# Altium PCB vreg2.PcbDoc
Units mm, origin at the board's own origin, x right, y up, seen from the top; angles counter-clockwise.
Board outline 19.5 x 41.25 mm, 2 copper layers (Top Layer, Bottom Layer), stack 1.581 mm thick; 33 components, 14 nets, 114 pads, 32 vias.
Unrouted connection lines stored in the file: 27.
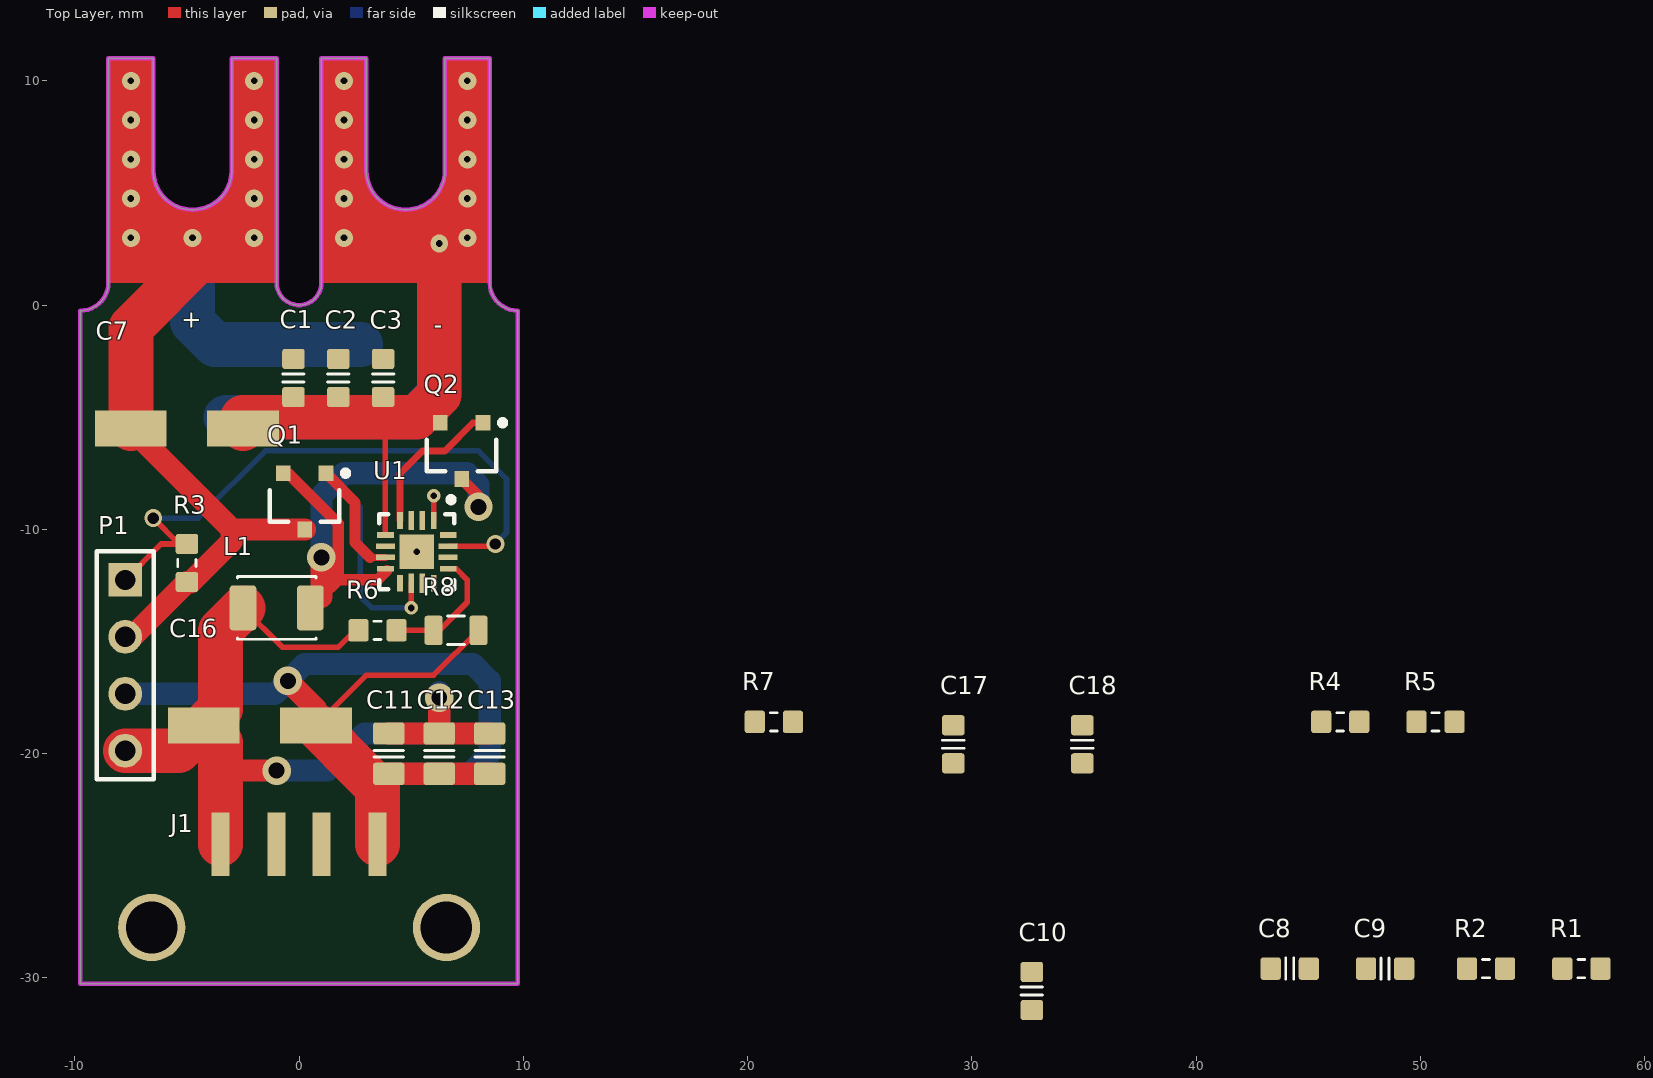
[diagram p0: Top Layer view]
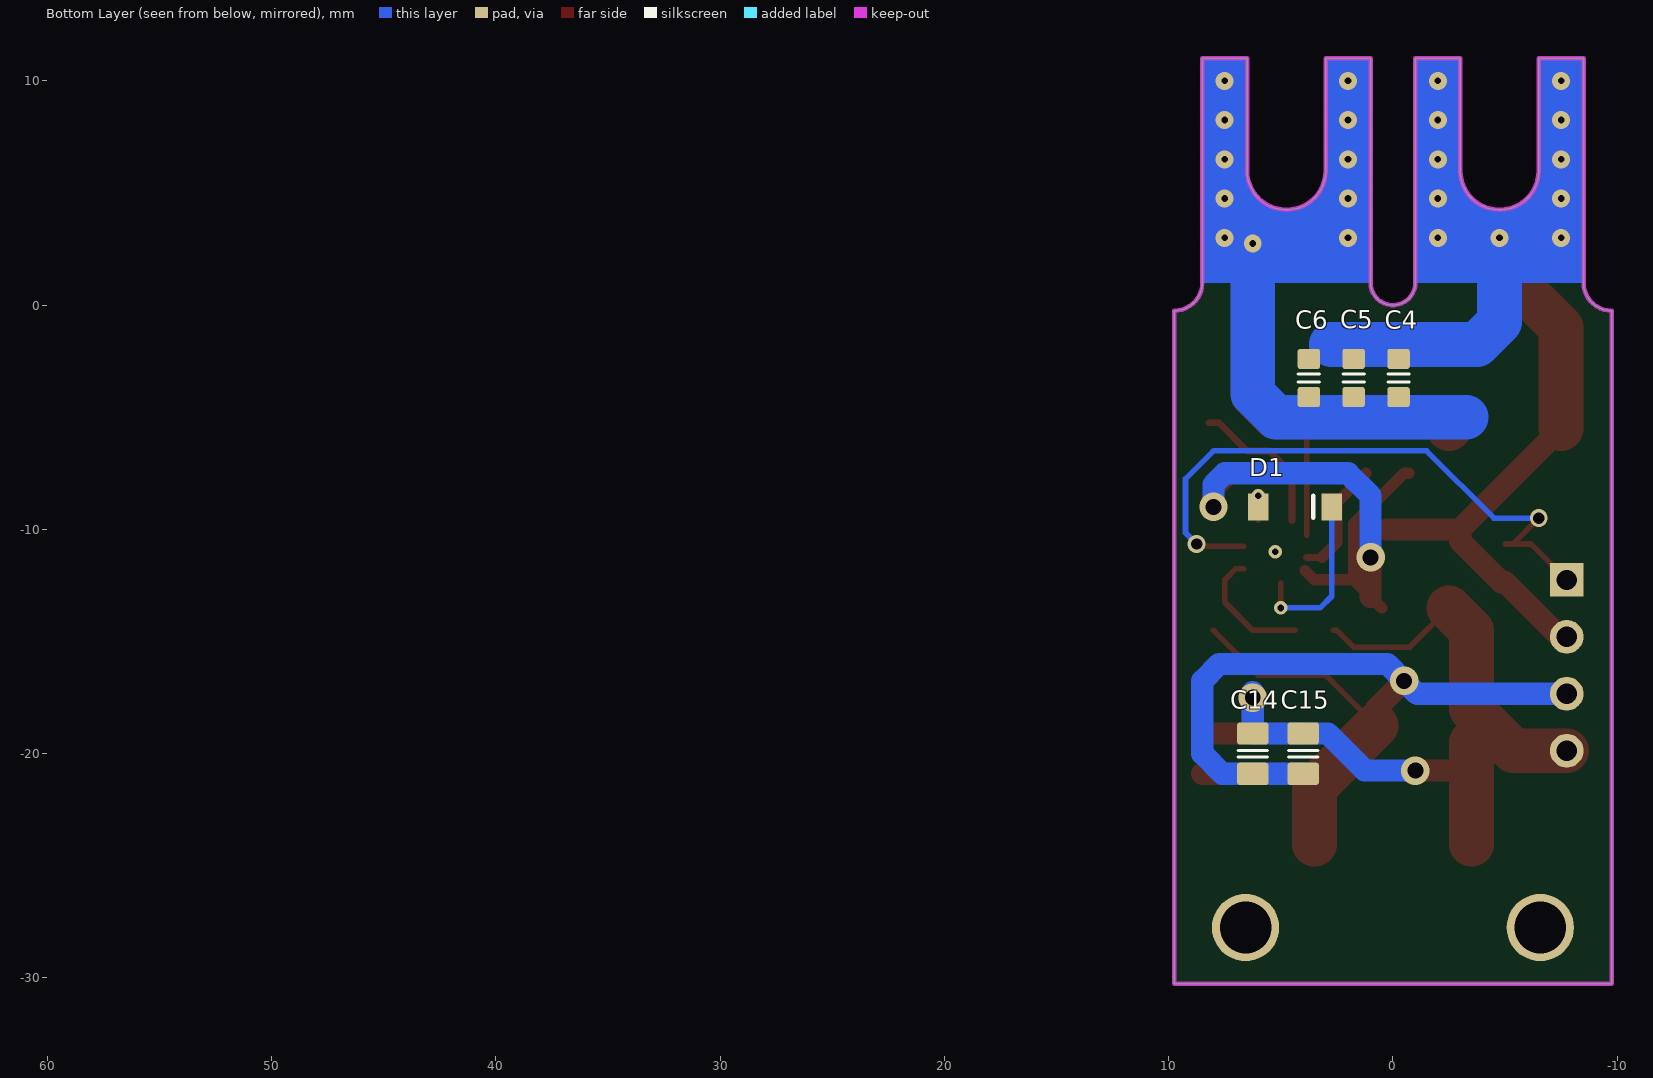
[diagram p1: Bottom Layer view, seen from below]

## Layer stack, top to bottom
Top Solder: solder mask 0.0102, Solder Resist, Dk 3.5
Top Layer: signal copper 0.0356
Dielectric1: dielectric 1.51, FR-4, Dk 4.8
Bottom Layer: signal copper 0.0356
Bottom Solder: solder mask 0.0102, Solder Resist, Dk 3.5

## Board outline
-9.75,-30.25 -9.75,-0.25 ccw(c-9.75,1) -8.5,1 -8.5,11 -6.5,11 -6.5,6 ccw(c-4.75,6) -3,6 -3,11 -1,11 -1,1 ccw(c0,1) 1,1 1,11 3,11 3,6 ccw(c4.75,6) 6.5,6 6.5,11 8.5,11 8.5,1 ccw(c9.75,1) 9.75,-0.25 9.75,-30.25

## Design rules (kind name [scope] priority, off if disabled: settings)
Clearance [All] p1: gap=0.2
FabricationTestPointUsage TestPointUsage [All] p1: valid=0 allowmultiple=FALSE
FabricationTestpoint Testpoint [All] p1: side=3 testpointundercomponent=TRUE minsize=1.016 maxsize=2.54 preferedsize=1.524 minholesize=0 maxholesize=1.016 preferedholesize=0.813 testpointgrid=0.025 allowsidetop=TRUE allowsidebottom=TRUE usegrid=TRUE gridtolerance=0
PlaneClearance [All] p1: clearance=0
PolygonConnect [All] p1: connectstyle=Relief reliefconductorwidth=0.254 reliefentries=4 polygonreliefangle="90 Angle" airgapwidth=0.254
RoutingVias [All] p1: holewidth=0.711 width=1.27 viastyle="Through Hole" minholewidth=0.711 minwidth=1.27 maxholewidth=0.711 maxwidth=1.27
SilkToSolderMaskClearance SilkscreenOverComponentPads [IsPad] p1: minsilkscreentomaskgap=0.254 clearancetoexposedcopper=TRUE
SolderMaskExpansion [All] p1: expansion=0.102
Width [All] p1: maxlimit=2 minlimit=0.25 preferedwidth=0.25 minimp=50.000000 maximp=50.000000 favimp=50.000000
26 further rules are at their usual default settings.

## Components (designator, comment, footprint, x,y, rotation, side; value= is the part's Value field where it differs from the comment)
C1 "approved sub OK" CAPC1608X90N -0.25,-3.25 r270 top
C2 "approved sub OK" CAPC1608X90N 1.75,-3.25 r270 top
C3 "approved sub OK" CAPC1608X90N 3.75,-3.25 r270 top
C4 "approved sub OK" CAPC1608X90N -0.25,-3.25 r270 bottom
C5 "approved sub OK" CAPC1608X90N 1.75,-3.25 r270 bottom
C6 "approved sub OK" CAPC1608X90N 3.75,-3.25 r270 bottom
C7 "47uF 50V" "Capacitor Panasonic FTV-D" -5,-5.5 r270 top
C8 "approved sub OK" CAPC1608X90N 44.169,-29.58 r0 top
C9 "approved sub OK" CAPC1608X90N 48.419,-29.58 r0 top
C10 "approved sub OK" CAPC1608X90N 32.67,-30.58 r90 top
C11 "approved sub OK" CAPC2012X135N 4,-20 r270 top
C12 "approved sub OK" CAPC2012X135N 6.25,-20 r270 top
C13 "approved sub OK" CAPC2012X135N 8.5,-20 r270 top
C14 "approved sub OK" CAPC2012X135N 6.25,-20 r270 bottom
C15 "approved sub OK" CAPC2012X135N 4,-20 r270 bottom
C16 "330uF 6.3V" "Capacitor Panasonic FTV-D" -1.75,-18.75 r270 top
C17 "approved sub OK" CAPC1608X90N 29.17,-19.58 r90 top
C18 "4.7n" CAPC1608X90N 34.92,-19.58 r90 top
D1 "BAT46W" BAT46W 6,-9 r180 bottom
J1 "USB A Socket" "USB A Socket - 1002-002-01100" 0,-24.25 r0 top
L1 "NLCV32T" INDM3225X240N -1,-13.5 r180 top
P1 "Header 4" HDR1X4 -7.75,-12.25 r270 top
Q1 "MOSFET N-CH 30V 6A 4.5V Drive SSM3K333R" SSM3K333R 0.25,-8.75 r270 top
Q2 "MOSFET N-CH 30V 6A 4.5V Drive SSM3K333R" SSM3K333R 7.25,-6.5 r270 top
R1 "Thick Film" RESC1608X55N 57.169,-29.58 r0 top
R2 "Thick Film" RESC1608X55N 52.919,-29.58 r0 top
R3 "Thick Film" RESC1608X55N -5,-11.5 r90 top
R4 "Thick Film" RESC1608X55N 46.42,-18.58 r0 top
R5 "Thick Film" RESC1608X55N 50.67,-18.58 r0 top
R6 "Thick Film" RESC1608X55N 3.5,-14.5 r0 top
R7 "Thick Film" RESC1608X55N 21.17,-18.58 r0 top
R8 "Thick Film" RESC2012X70N 7,-14.5 r0 top
U1 "MIC2101/02" QFN50P300X300X90_HS-17N 5.25,-11 r270 top

## Footprints (in the part's own frame and the unit in brackets; to place one, negate y for a bottom-side part, rotate by r counter-clockwise, add the part's x,y. Pads: shape width x height; smd on the part's side, far side on the other; paste and mask are expansions set on the pad)
BAT46W [mil]
  rect 36x48 smd: A(0,0) K(128.74,0)
  silkscreen extent 97,-19 97,19
"Capacitor Panasonic FTV-D" [mm]
  rect 1.6x3.2 smd: +(0,-2.5) -(0,2.5)
  body extent -3.3,-3.3 3.3,3.3, height 5.8
CAPC1608X90N [mm] "Chip Capacitor, Body 1.6x0.8mm, EIA 0603, IPC Medium Density"
  round 0.254 on Mech15: 0(0,0)
  rrect25% 0.9x1 smd: 1(-0.85,0) 2(0.85,0)
  Top Layer pour cut-out: -0.6,0.5 -0.4,0.7 0.4,0.7 0.6,0.5 0.6,-0.5 0.4,-0.7 -0.4,-0.7 -0.6,-0.5
  silkscreen extent -0.18,-0.48 0.18,0.48, body extent -0.85,-0.45 0.85,0.45, height 0.89
CAPC2012X135N [mm] "Chip Capacitor, Body 2.0x1.2mm, EIA 0805, IPC Medium Density"
  round 0.254 on Mech15: 0(0,0)
  rrect25% 1x1.4 smd: 1(-0.9,0) 2(0.9,0)
  Top Layer pour cut-out: -0.675,0.7 -0.475,0.9 0.475,0.9 0.675,0.7 0.675,-0.7 0.475,-0.9 -0.475,-0.9 -0.675,-0.7
  silkscreen extent -0.15,-0.65 0.15,0.65, body extent -1.1,-0.72 1.1,0.73, height 1.34
HDR1X4 [mm] "Connector; Header; 4 Position"
  rect 1.5x1.5 hole 0.9: 1(0,0)
  round 1.5 hole 0.9: 2(2.54,0) 3(5.08,0) 4(7.62,0)
  silkscreen extent -1.27,-1.27 8.89,1.27
INDM3225X240N [mm] "Molded Inductor, 2-Leads, Body 3.2x2.5mm, IPC Medium Density"
  round 0.508 on Mech15: 0(0,0)
  rrect25% 1.2x2 smd: 1(-1.5,0) 2(1.5,0)
  silkscreen extent -1.75,-1.4 1.75,1.4, body extent -1.79,-1.35 1.79,1.35, height 2.4
QFN50P300X300X90_HS-17N [mm] "QFN, 16-Leads, Body 3.00x3.00mm, Pitch 0.50mm, Thermal Pad 1.55x1.55mm, IPC Medium Density"
  rect 0.75x0.25 smd: 1(-1.4,0.75) 4(-1.4,-0.75) 9(1.4,-0.75) 12(1.4,0.75)
  rect 0.85x0.25 smd: 2(-1.4,0.25) 3(-1.4,-0.25) 10(1.4,-0.25) 11(1.4,0.25)
  rect 0.25x0.75 smd: 5(-0.75,-1.4) 8(0.75,-1.4) 13(0.75,1.4) 16(-0.75,1.4)
  rect 1.55x1.55 smd: 5(0,0)
  rect 0.25x0.85 smd: 6(-0.25,-1.4) 7(0.25,-1.4) 14(0.25,1.4) 15(-0.25,1.4)
  silkscreen extent -2.45,-1.68 1.68,1.68, body extent -1.53,-1.53 1.53,1.53, height 0.9
RESC1608X55N [mm] "Chip Resistor, Body 1.6x0.8mm, EIA 0603, IPC Medium Density"
  round 0.254 on Mech15: 0(0,0)
  rrect25% 0.9x1 smd: 1(-0.85,0) 2(0.85,0)
  Top Layer pour cut-out: -0.6,0.5 -0.4,0.7 0.4,0.7 0.6,0.5 0.6,-0.5 0.4,-0.7 -0.4,-0.7 -0.6,-0.5
  silkscreen extent -0.15,-0.41 0.15,0.41, body extent -0.87,-0.47 0.88,0.48, height 0.54
RESC2012X70N [mm] "Chip Resistor, Body 2.0x1.2mm, EIA 0805, IPC Medium Density"
  round 0.254 on Mech15: 0(0,0)
  rrect25% 0.8x1.3 smd: 1(-1,0) 2(1,0)
  Top Layer pour cut-out: -0.725,0.65 -0.525,0.85 0.525,0.85 0.725,0.65 0.725,-0.65 0.525,-0.85 -0.525,-0.85 -0.725,-0.65
  silkscreen extent -0.38,-0.64 0.38,0.64, body extent -1.1,-0.67 1.1,0.68, height 0.69
SSM3K333R [mm] "SOT23, 3-Leads, Body 2.90x2.40mm, Pitch 0.95mm, IPC Medium Density"
  rect 0.7x0.65 smd: D(1.255,0) G(-1.255,0.95) S(-1.255,-0.95)
  silkscreen extent -1.38,-1.55 0.91,1.95, body extent -0.9,-1.55 0.91,1.55, height 0.9
"USB A Socket - 1002-002-01100" [mm]
  round 3 hole 2.3: 0(-6.57,-3.5) 0(6.57,-3.5)
  rect 0.8x2.82 smd: 1(-3.5,0.21) 2(-1,0.21) 3(1,0.21) 4(3.5,0.21)
  body extent -7.08,-9.1 7.54,0.4, height 6.62

## Part data
C1 C2 C3 C4 C5 C6: library part CAPC_100n_0603_X7R_50V_10%, "Capacitor SMD Cer 100nF 10% 50V X7R 0603"
C7: library part "CAPE 47uF 50V"
C8 C9 C10 C17: library part CAPC_1n_0603_X7R_100V_10%, "Capacitor SMD Cer 1nF 10% 100V X7R 0603"
C11 C12 C13 C14 C15: library part CAPC_10u_0805_10V, "Capacitor SMD Cer 10uF 10% 10V X5R 0805"
C16: library part "CAPE 330uF 6.3V UUD0J221MCL1GS_1"
C18: library part CAPC_47n_0603_X7R_50V_10%, "Capacitor SMD Cer 47nF 10% 50V X7R 0603"
L1: library part INDC_2u2_1210_1200mA, "Inductor 2.2uH 1.2A 1210 SMD chip"
P1: "Header, 4-Pin"
R1 R2 R3 R4 R5: library part RES_100K_0603_1%, "Resistor SMD chip 100k Ohm 0.1W 1% 0603"
R6: library part RES_10K_0603_1%, "Resistor SMD chip 10k Ohm 0.1W 1% 0603"
R7: library part RES_51K_0603_1%, "Resistor SMD chip 51k Ohm 0.1W 1% 0603"
R8: library part RES_1K8_0805_1%, "Resistor SMD chip 1.8k Ohm 0.125W 1% 0805"

## Via types
v1: diameter 0.8, hole 0.3, Top Layer to Bottom Layer, 22 vias
v2: diameter 1.27, hole 0.711, Top Layer to Bottom Layer, 5 vias
v3: diameter 0.6, hole 0.3, Top Layer to Bottom Layer, 3 vias
v4: diameter 0.8, hole 0.5, Top Layer to Bottom Layer, 2 vias

## Nets (pads, with @x,y where several pads share a name; then routed paths per layer and width w, separated by ;. In a path a pad name is that pad's centre, name@x,y a point inside that pad or via, vN(x,y) a via of type N, cw(c..) or ccw(c..) an arc to the next point about the centre after c; other vN are vias at no path point)
ENABLE: P1.1 R3.2 U1.15 | length 27.8
  Top Layer w0.25: P1.1 -6.15,-10.65 R3.2@-5.35,-10.65 ; v4(-6.5,-9.5) R3.2@-5.35,-10.65 ; R3.2 R3.2@-5.35,-10.65 ; U1.15 8.65,-10.75 v4(8.75,-10.65)
  Bottom Layer w0.25: v4(-6.5,-9.5) -4.5,-9.5 -1.5,-6.5 8,-6.5 9.25,-7.75 9.25,-10.15 v4(8.75,-10.65)
GND: C1.2 C2.2 C3.2 C4.2 C5.2 C6.2 C7.- C8.2 C9.2 C11.2 C12.2 C13.2 C14.2 C15.2 C16.- J1.4 P1.3 Q2.S R2.2 R8.2 U1.5 U1.12 | length 91.5
  Top Layer w0.25: C16.- 3,-16.5 6,-16.5 R8.2 ; 3.75,-5 3.85,-5.1 U1.5@3.85,-10.25
  Top Layer w1: v2(-0.5,-16.75) 0.75,-18 C16.- ; J1.4 3.5,-22.25 2.9,-21.65 2.9,-20.9 C11.2 C12.2 C13.2
  Top Layer w2: C7.- -2.5,-5 3.75,-5 5.25,-5 6.25,-4 6.25,2.25 4.75,2.25 ; C16.- 2.9,-20.9 3.5,-21.5 3.5,-22.25 J1.4
  Bottom Layer w1: P1.3 -1.08,-17.33 v2(-0.5,-16.75) 0.25,-16 7.75,-16 8.5,-16.75 8.5,-20 7.6,-20.9 C14.2 C15.2
  Bottom Layer w2: -3.25,-5 5.2,-5 6.25,-3.95 v1(6.25,2.75)
  other v1: 2,3 7.5,3 2,4.75 7.5,4.75 2,6.5 7.5,6.5 2,8.25 7.5,8.25 2,10 7.5,10
  other v3: 5.25,-11
NetC8_1: C8.1 C9.1 D1.A R7.1 U1.1 U1.2 | length 1.1
  Top Layer w0.25: U1.1 v3(6,-8.5)
NetC10_1: C10.1 D1.K U1.10 | length 7.6
  Top Layer w0.25: v3(5,-13.5) U1.10
  Bottom Layer w0.25: D1.K 2.73,-12.98 3.25,-13.5 v3(5,-13.5)
NetC10_2: C10.2 L1.1 Q1.S Q2.D R4.1 R5.1 U1.8 | length 24.7
  Top Layer w0.5: Q1.S -0.505,-7.495 1.75,-9.75 1.75,-12.25 ; L1.1 1,-13 1.75,-12.25 ; U1.8@3.92,-11.83 3.5,-12.25 1.75,-12.25 ; Q2.D 8,-8.505 v2(8,-9)
  Top Layer w1: L1.1@1,-13 v2(1,-11.25)
  Bottom Layer w1: v2(1,-11.25) 1,-8.5 2,-7.5 7.5,-7.5 8,-8 v2(8,-9)
NetC17_1: C17.1 R5.2
NetC17_2: C17.2 C18.2 R6.2 R8.1 U1.13 | length 5.7
  Top Layer w0.25: R6.2 R8.1 6.25,-14.5 7.5,-13.25 7.5,-12.25 7,-11.75 U1.13
NetQ1_G: Q1.G U1.7 | length 5.3
  Top Layer w0.3: 3.164,-11.25 U1.7
  Top Layer w0.5: Q1.G 2.5,-8.795 2.5,-10.586 3.164,-11.25
NetQ2_G: Q2.G U1.4 | length 6.7
  Top Layer w0.3: U1.4 4.5,-7.5 5.5,-6.5 6.5,-6.5 7.755,-5.245 Q2.G
NetR1_2: R1.2 R2.1 U1.6
NetR4_2: R4.2 U1.3
NetR7_2: R7.2 U1.14
VCC: C1.1 C2.1 C3.1 C4.1 C5.1 C6.1 C7.+ P1.2 Q1.D R1.1 R3.1 U1.16 | length 37.1
  Top Layer w1: P1.2 -7.44,-14.79 R3.1 -4.826,-12.35 -2.995,-10.519 -2.995,-10.005 ; C7.+ -2.995,-10.005 ; Q1.D -2.995,-10.005
  Top Layer w2: C7.+ -7.5,-1 -4.5,2
  Bottom Layer w2: v1(-4.75,3) -4.75,-0.75 -3.75,-1.75 2.75,-1.75
  other v1: -7.5,3 -2,3 -7.5,4.75 -2,4.75 -7.5,6.5 -2,6.5 -7.5,8.25 -2,8.25 -7.5,10 -2,10
VOUT: C11.1 C12.1 C13.1 C14.1 C15.1 C16.+ C18.1 J1.1 L1.2 P1.4 R6.1 | length 40.1
  Top Layer w0.25: L1.2 -0.75,-15.25 1.75,-15.25 2.5,-14.5 R6.1
  Top Layer w1: -3.5,-20.75 v2(-1,-20.75) ; C11.1 C12.1 ; v2(6.25,-17.5) C12.1 ; C13.1 C12.1
  Top Layer w2: P1.4 -5.37,-19.87 C16.+ ; J1.1 -3.5,-20.75 -3.5,-19.5 C16.+ ; L1.2 -3.5,-14.5 -3.5,-18 C16.+
  Bottom Layer w1: v2(-1,-20.75) 1.25,-20.75 2.9,-19.1 C15.1 C14.1 v2(6.25,-17.5) v2@6.25,-17.25
pads on no net: C1.0 C2.0 C3.0 C4.0 C5.0 C6.0 C8.0 C9.0 C10.0 C11.0 C12.0 C13.0 C14.0 C15.0 C17.0 C18.0 J1.0 J1.2 J1.3 L1.0 R1.0 R2.0 R3.0 R4.0 R5.0 R6.0 R7.0 R8.0 U1.9 U1.11

## Keep-outs
Keep-Out Layer:
  the board outline again, w0.2

## Other copper
Top Layer:
  region net VCC: -8.5,1 -8.5,11 -6.5,11 -6.5,6 ccw(c-4.75,6) -3,6 -3,11 -1,11 -1,1
  region net GND: 1,1 1,11 3,11 3,6 ccw(c4.75,6) 6.5,6 6.5,11 8.5,11 8.5,1
Bottom Layer:
  region net VCC: -1,1 -1,11 -3,11 -3,6 cw(c-4.75,6) -6.5,6 -6.5,11 -8.5,11 -8.5,1
  region net GND: 8.5,1 8.5,11 6.5,11 6.5,6 cw(c4.75,6) 3,6 3,11 1,11 1,1

## Silkscreen, mask and mechanical layers (free items; w line width, h text height)
Top Overlay:
  text "+" at -5.25,-1 h0.8
  text "-" at 6,-1.25 h0.8
Top Solder:
  region: -8.5,1 -8.5,11 -6.5,11 -6.5,6 ccw(c-4.75,6) -3,6 -3,11 -1,11 -1,1
  region: 1,1 1,11 3,11 3,6 ccw(c4.75,6) 6.5,6 6.5,11 8.5,11 8.5,1
Bottom Solder:
  region: -1,1 -1,11 -3,11 -3,6 cw(c-4.75,6) -6.5,6 -6.5,11 -8.5,11 -8.5,1
  region: 8.5,1 8.5,11 6.5,11 6.5,6 cw(c4.75,6) 3,6 3,11 1,11 1,1
Mechanical 13:
  lines w0.2: -9.75,-0.25 9.75,-0.25
Mechanical 16:
  drawing of 1874 lines, arcs and shapes, not listed
  text "1" at -102.254,85.611 h0.8
  text "2" at -29.61,85.611 h0.8
  text "3" at 43.542,85.611 h0.8
  text "4" at 116.44,85.611 h0.8
  text "A" at -136.595,62.599 h0.8
  text "A" at 150.425,62.599 h0.8
  text "B" at -136.595,14.542 h0.8
  text "B" at 150.425,14.542 h0.8
  text "C" at 150.425,-13.472 h0.8
  text "C" at -136.595,-33.972 h0.8
  text "ENGINEER:" at 35.49,-70.98 h0.8
  text "TITLE:" at 73.59,-70.98 h0.8
  text "PCB DESIGNER:" at 35.49,-78.473 h0.8
  text "D" at -136.595,-81.978 h0.8
  text "D" at 150.425,-81.978 h0.8
  text "DATE:" at 35.49,-86.22 h0.8
  text "PART NO.:" at 73.59,-86.22 h0.8
  text "REV:" at 126.93,-86.22 h0.8
  text "Altium Limited" at 2.47,-88.76 h0.8
  text ".PRINT_DATE" at 36.76,-89.268 h0.8
  text "12a Rodborough Rd" at 2.47,-91.3 h0.8
  text "Frenchs Forest" at 2.47,-93.84 h0.8
  text "FILE NAME:" at 35.49,-93.84 h0.8
  text "DWG NO:" at 73.59,-93.84 h0.8
  text "SCALE:" at 126.93,-93.84 h0.8
  text "NSW 2086" at 2.47,-96.38 h0.8
  text ".PCB_FILE_NAME_NO_PATH" at 36.76,-96.888 h0.8
  text "1" at -102.254,-102.349 h0.8
  text "2" at -29.61,-102.349 h0.8
  text "3" at 43.542,-102.349 h0.8
  text "4" at 116.44,-102.349 h0.8

## Dimensions
-9.75,-30.25 to 9.75,-30.25 on Mechanical 1
9.75,-0.25 to -9.75,-30.25 on Mechanical 1
-8.5,11 to -9.75,-30.25 on Mechanical 1
-8.5,11 to -1,11 on Mechanical 1
-8.5,11 to 8.5,11 on Mechanical 1
-6.5,11 to -3,11 on Mechanical 1